# Altium PCB pcb_LAB_rev0.PcbDoc (part 2 of 2)
Units mil, origin at the board's own origin, x right, y up, seen from the top; angles counter-clockwise.
Board outline 6385 x 5855 mil, 2 copper layers (Top Layer, Bottom Layer); 127 components, 63 nets, 386 pads, 32 vias.
Unrouted connection lines stored in the file: 3.
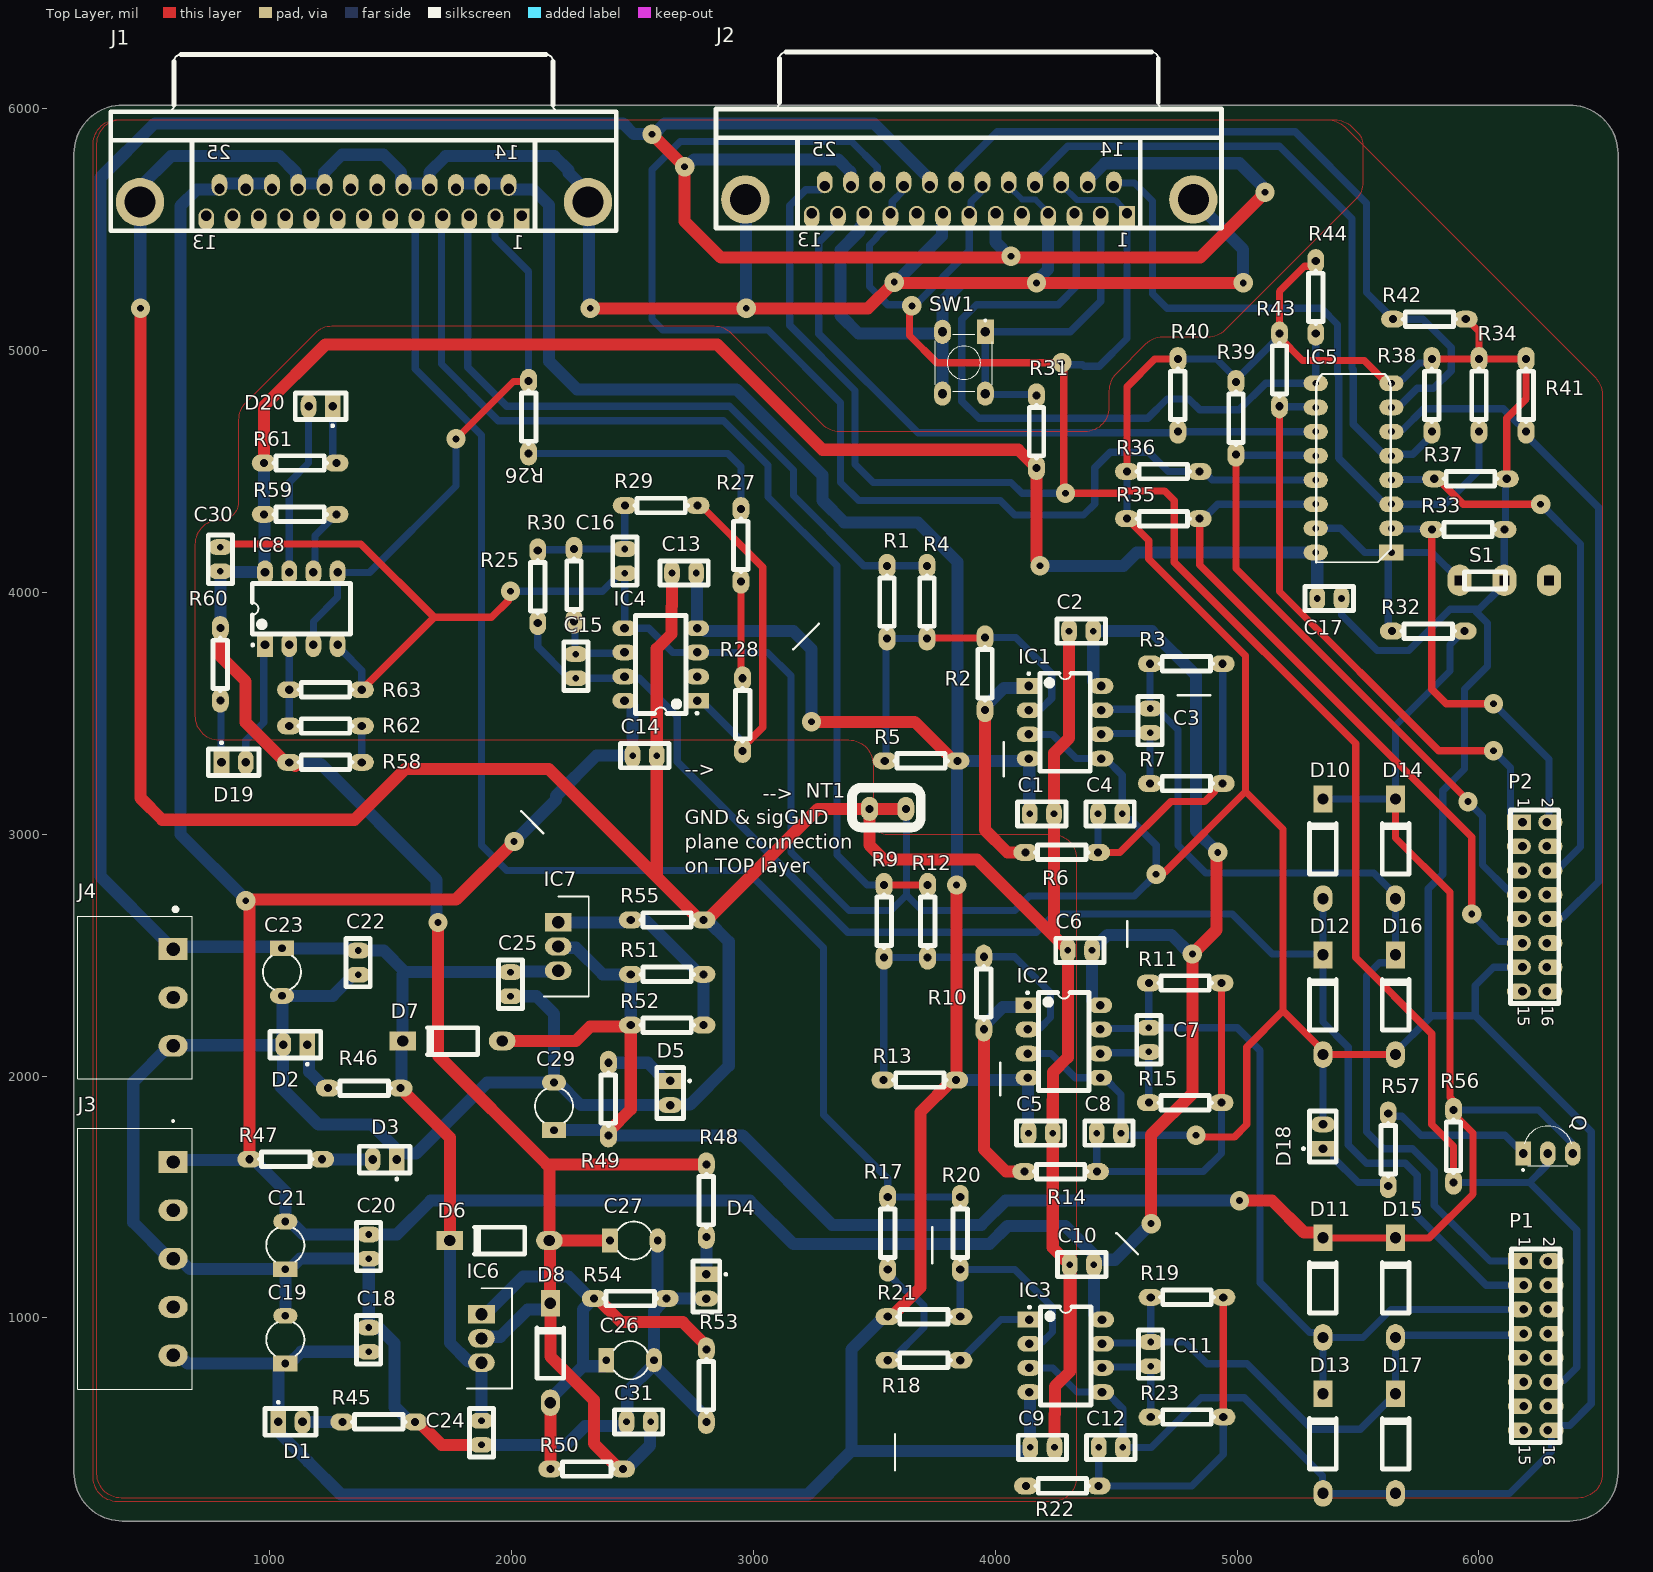
[diagram p0: Top Layer view]

## Polygon pours and split planes (outlines as drawn) (continued)
sigGND on Bottom Layer "sigGND_BOT" (solid, remove dead copper, shelved, pour order 7): 5373.58,5955 cw(c5373.58,5855) 5444.29,5925.71 6480.71,4889.29 cw(c6410,4818.58) 6510,4818.58 6510,355 cw(c6410,355) 6410,255 385,255 cw(c385,355) 285,355 285,5855 cw(c385,5855) 385,5955 3690,5955

## Silkscreen, mask and mechanical layers (free items; w line width, h text height)
Top Overlay:
  lines w10: 2040,3095 2130,3005 ; 3165,3765 3270,3870 ; 3585,370 3585,520 ; 3740,1225 3740,1375 ; 4020,1920 4020,2055 ; 4035,3240 4035,3380.54 ; 4500,1350 4503.3,1350 4590,1263.3 ; 4545,2535 4545,2640 ; 4755,3575 4890,3575
  lines w40: 3407.08,3067.95 ccw(c3447.08,3067.95) 3447.08,3027.95 3652.08,3027.95 ccw(c3652.08,3067.95) 3692.08,3067.95 3692.08,3152.95 ccw(c3652.08,3152.95) 3652.08,3192.95 3447.08,3192.95 ccw(c3447.08,3152.95) 3407.08,3152.95 3407.08,3067.95
  text "--> /              --> / GND & sigGND / plane connection / on TOP layer" at 2715,2820 h100
Mechanical 13:
  lines w10: 190,360 ccw(c390,360) 390,160 6375,160 ccw(c6375,360) 6575,360 6575,5815 ccw(c6375,5815) 6375,6015 390,6015 ccw(c390,5815) 190,5815 190,360 ; 300,6450 300,6450 ; 6450,6451.57 6450,6451.57

## Text inside footprints (layer, text, board x,y; h text height)
J1: Top Overlay "1" at 2051.4,5418.23 h59.06; Top Overlay "13" at 781.44,5418.23 h59.06; Top Overlay "14" at 2031.5,5792.24 h59.06; Top Overlay "25" at 840.71,5792.24 h59.06
J2: Top Overlay "25" at 3343.86,5802.85 h59.06; Top Overlay "14" at 4534.65,5802.85 h59.06; Top Overlay "13" at 3284.59,5428.84 h59.06; Top Overlay "1" at 4554.55,5428.84 h59.06
P1: Top Overlay "2" at 6265,1335 h50 r270; Top Overlay "1" at 6165,1335 h50 r270; Top Overlay "15" at 6165,475 h50 r270; Top Overlay "16" at 6265,475 h50 r270
P2: Top Overlay "16" at 6260,2290 h50 r270; Top Overlay "15" at 6160,2290 h50 r270; Top Overlay "1" at 6160,3150 h50 r270; Top Overlay "2" at 6260,3150 h50 r270